# Altium PCB RailGun and Grabber PCB.PcbDoc (part 1 of 2)
Units mm, origin at the board's own origin, x right, y up, seen from the top; angles counter-clockwise.
Board outline 60 x 60 mm, 2 copper layers (Top Layer, Bottom Layer); 106 components, 58 nets, 345 pads, 4 vias.
Unrouted connection lines stored in the file: 213.
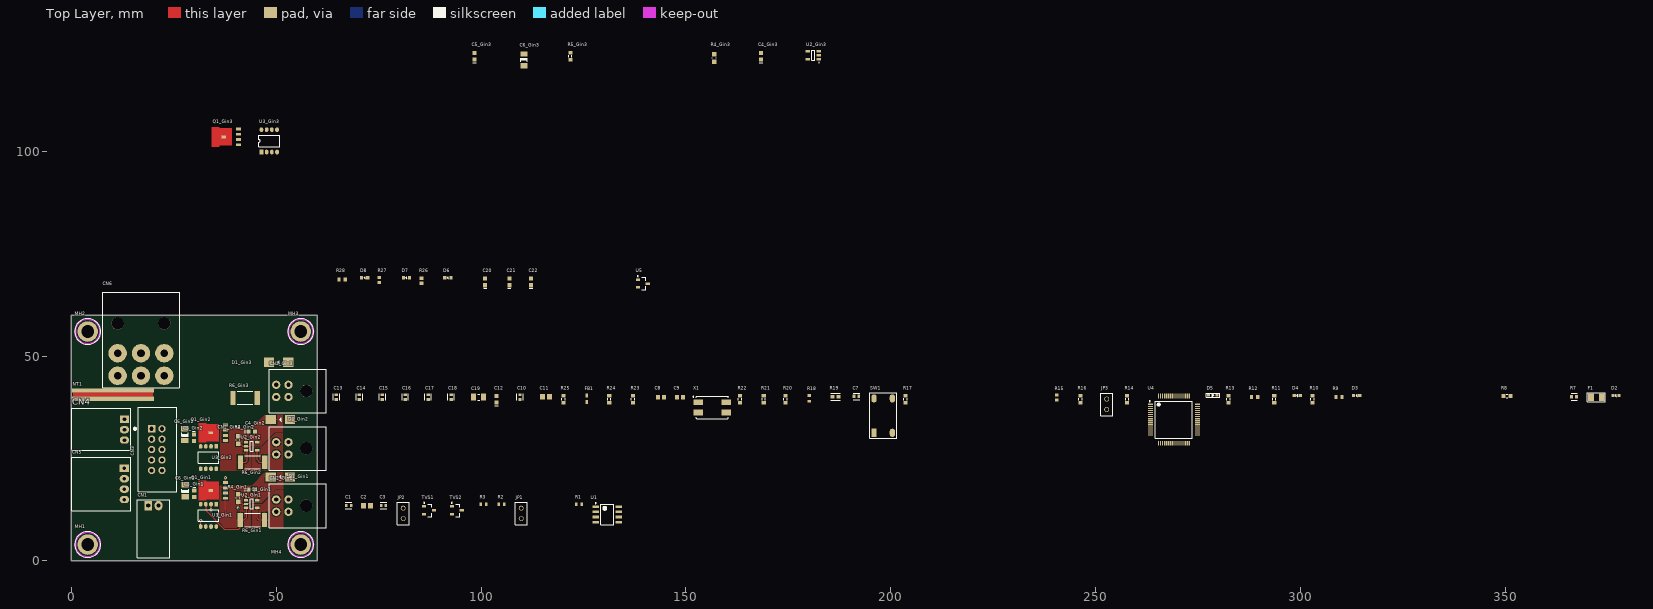
[diagram p0: Top Layer view]
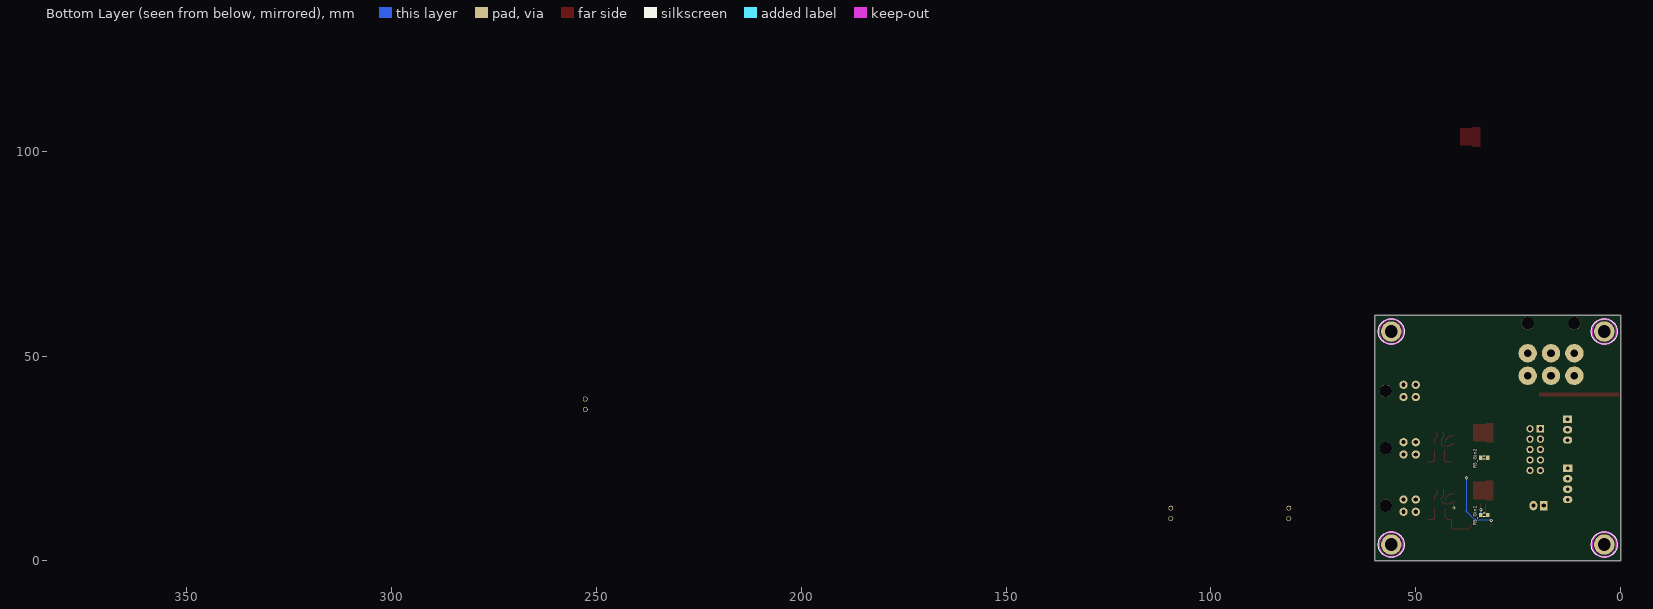
[diagram p1: Bottom Layer view, seen from below]

## Layer stack, top to bottom
Top Solder: solder mask 0.0102, Solder Resist, Dk 3.5
Top Layer: signal copper 0.0356
Dielectric 1: dielectric 0.32, FR-4, Dk 4.8
Bottom Layer: signal copper 0.0356
Bottom Solder: solder mask 0.0102, Solder Resist, Dk 3.5

## Board outline
0,0 0,60 60,60 60,0

## Design rules (kind name [scope] priority, off if disabled: settings)
Clearance [All] p1: gap=0.254 ignorepadtopadclearanceinfootprint=TRUE except(0: Arc-Hole Track-Hole SMDPad-Hole THPad-Hole Via-Hole Fill-Hole Poly-Hole Region-Hole Text-Hole; 0.203: Arc-Arc Arc-Track Arc-SMDPad Track-Track Track-SMDPad SMDPad-SMDPad)
DiffPairsRouting [All] p1: maxlimit=0.254 minlimit=0.254 mostfreqgap=0.254 toplayer_minwidth=0.152 toplayer_maxwidth=0.254 toplayer_prefwidth=0.203 bottomlayer_minwidth=0.152 bottomlayer_maxwidth=0.254 bottomlayer_prefwidth=0.203 maxuncoupledlength=12.7
PolygonConnect [All] p1: connectstyle=Relief reliefconductorwidth=0.254 reliefentries=4 polygonreliefangle="90 Angle" airgapwidth=0.254
RoutingVias [All] p1: holewidth=0.254 width=0.508 viastyle="Through Hole" minholewidth=0.127 minwidth=0.254 maxholewidth=0.381 maxwidth=0.762
SolderMaskExpansion [All] p1: expansion=0.102 istentingtop=FALSE
UnRoutedNet [All] p1: checkbadconnections=TRUE
Width [All] p1: maxlimit=1 minlimit=0.152 preferedwidth=0.203 minimp=50.000000 maximp=50.000000 favimp=50.000000
28 further rules are at their usual default settings.

## Classes and differential pairs
channel class "Control Gates": Gin1 Gin2 Gin3
net class Phase_Input[1..3]: Phase_Input1 Phase_Input2 Phase_Input3
net class Phase_Current[1..3]: Phase_Current1 Phase_Current2 Phase_Current3
component class Gin3: C4_Gin3 C5_Gin3 C6_Gin3 CN2_Gin3 D1_Gin3 Q1_Gin3 R4_Gin3 R5_Gin3 R6_Gin3 U2_Gin3 U3_Gin3
component class Gin2: C4_Gin2 C5_Gin2 C6_Gin2 CN2_Gin2 D1_Gin1 Q1_Gin2 R4_Gin1 R5_Gin2 R6_Gin2 U2_Gin2 U3_Gin2
component class Gin1: C4_Gin1 C5_Gin1 C6_Gin1 CN2_Gin1 D1_Gin1 Q1_Gin1 R4_Gin1 R5_Gin1 R6_Gin1 U2_Gin1 U3_Gin2
component class Power: C20 C21 C22 CN6 D6 D7 D8 NT1 R26 R27 R28 U5
component class Micro: C7 C8 C9 C10 C11 C12 C13 C14 C15 C16 C17 C18 C19 CN3 CN4 CN5 D2 D3 D4 D5 F1 FB1 JP3 MH1 MH2 MH3 MH4 R7 R8 R9 R10 R11 R12 R13 R14 R15 R16 R17 R18 R19 R20 R21 R22 R23 R24 R25 SW1 U4 X1
component class CAN: C1 C2 C3 CAN0 CN1 JP1 JP2 R1 R2 R3 TVS1 TVS2 U1
differential pair CAN: +CAN_P -CAN_N

## Components (designator, comment, footprint, x,y, rotation, side; value= is the part's Value field where it differs from the comment)
C1 "CL10B104JB8NNNC" FP-CL10-0_1-MFG 67.7,13.55 r0 top
C2 "CL21B105KBFNNNG" "0803 CAP" 72.2,13.45 r0 top
C3 "CL10B104JB8NNNC" FP-CL10-0_1-MFG 76.2,13.55 r0 top
C4_Gin1 "0.1uF" "CAPC1608N(0603\")" 44,17.4 r0 top (schematic designator C4)
C4_Gin2 "0.1uF" "CAPC1608N(0603\")" 44,31.6 r0 top (schematic designator C4)
C4_Gin3 "0.1uF" "CAPC1608N(0603\")" 168.3,123.2 r90 top (schematic designator C4)
C5_Gin1 "0.1uF" "CAPC1608N(0603\")" 30,16.4 r270 top (schematic designator C5)
C5_Gin2 "0.1uF" "CAPC1608N(0603\")" 29.9,30.1 r270 top (schematic designator C5)
C5_Gin3 "0.1uF" "CAPC1608N(0603\")" 98.4,123.2 r90 top (schematic designator C5)
C6_Gin1 "10uF 50V" "CAPC3216N(1206\")" 27.8,17.15 r270 top value=10µF (schematic designator C6)
C6_Gin2 "10uF 50V" "CAPC3216N(1206\")" 27.7,30.85 r270 top value=10µF (schematic designator C6)
C6_Gin3 "10uF 50V" "CAPC3216N(1206\")" 110.5,122.3 r90 top value=10µF (schematic designator C6)
C7 "CL10B104JB8NNNC" FP-CL10-0_1-MFG 191.6,40.175 r0 top
C8 "16pF Ceramic 50V 5% 0603" CAPC1608X90X35ML10T15 143.9,39.975 r0 top
C9 "16pF Ceramic 50V 5% 0603" CAPC1608X90X35ML10T15 148.6,39.975 r0 top
C10 "CL10B104JB8NNNC" FP-CL10-0_1-MFG 109.5,39.975 r90 top
C11 "CL21B105KBFNNNG" "0803 CAP" 115.9,40.075 r0 top
C12 "2.2uF, 50V" "CAPC1608N(0603\")" 103.8,39.475 r90 top value=2.2µF
C13 "CL10B104JB8NNNC" FP-CL10-0_1-MFG 64.7,39.975 r90 top
C14 "CL10B104JB8NNNC" FP-CL10-0_1-MFG 70.3,39.975 r90 top
C15 "CL10B104JB8NNNC" FP-CL10-0_1-MFG 75.9,39.975 r90 top
C16 "CL10B104JB8NNNC" FP-CL10-0_1-MFG 81.5,39.975 r90 top
C17 "CL10B104JB8NNNC" FP-CL10-0_1-MFG 87.1,39.975 r90 top
C18 "CL10B104JB8NNNC" FP-CL10-0_1-MFG 92.7,39.975 r90 top
C19 "50V 10uF" CAPC3216X180X50LL20T30 99.4,39.975 r0 top
C20 "0.1uF, 50V, 10%, X7R, 1608" "CAPC1608N(0603\")" 101,68.1 r90 top
C21 "1uF 50V 0603 SMD, Ceramic" "CAPC1608N(0603\")" 106.9,68.1 r90 top value=1µF
C22 "1uF 50V 0603 SMD, Ceramic" "CAPC1608N(0603\")" 112.2,68.1 r90 top value=1µF
CN1 "1x2 Shrouded Right Angle" "2X1 Female Header" 18.76,13.5 r90 top
CN2_Gin1 "Header, Female, 2x2, RIght Angle, Pitch: 0.118\"  (3.00mm), THT" "2x2 Pitch 118mil connector" 53,15 r270 top (schematic designator CN2)
CN2_Gin2 "Header, Female, 2x2, RIght Angle, Pitch: 0.118\"  (3.00mm), THT" "2x2 Pitch 118mil connector" 53,29 r270 top (schematic designator CN2)
CN2_Gin3 "Header, Female, 2x2, RIght Angle, Pitch: 0.118\"  (3.00mm), THT" "2x2 Pitch 118mil connector" 53,43 r270 top (schematic designator CN2)
CN3 "ST Debug Header 10-pin THT" "10-pin shrouded header THT" 19.6,32.26 r270 top
CN4 "Header, Male, 1x3, RA, Pitch (2.54mm) 0.1\"" 5-103635-2-Footprint-1 12.964,34.58 r0 top
CN5 "Header, Male, 1x4, RA, Pitch 0.1\" (2.54mm)" "HEADER, MALE, SHROUDED, 4x1, PITCH 0.1\" (2.54mm), RA" 12.954,22.6 r0 top
CN6 "76825-0006" 76825-0006-Footprint-1 11.3,50.7 r0 top
D1_Gin1 "TSSA5U50E3GCT-ND" DO-214AC 51.05,20.5 r180 top (schematic designator D1)
D1_Gin2 "TSSA5U50E3GCT-ND" DO-214AC 51.05,34.5 r180 top (schematic designator D1)
D1_Gin3 "TSSA5U50E3GCT-ND" DO-214AC 50.6,48.5 r180 top (schematic designator D1)
D2 "Red" FP-LB_Q39E-MFG 376.999,40.375 r0 top
D3 "Blue" FP-LB_Q39E-MFG 313.7,40.375 r0 top
D4 "Green" FP-LB_Q39E-MFG 299.2,40.375 r0 top
D5 "CUS08F30,H3F" SC-76 278.6,40.475 r0 top
D6 "Green" FP-LB_Q39E-MFG 91.9,69.1 r0 top
D7 "Green" FP-LB_Q39E-MFG 81.8,69.1 r0 top
D8 "Green" FP-LB_Q39E-MFG 71.6,69.1 r0 top
F1 "SMD Fuse, 2A, 63V," "1206 SMD" 372.199,39.975 r0 top
FB1 "BLM18AG601SN1D" MURA-BLM18-F-H1-CHIP-2_V 125.8,39.575 r90 top
JP1 "1x2 Male Header" "2X1 Males Header" 109.8,10.35 r90 top
JP2 "1x2 Male Header" "2X1 Males Header" 81,10.35 r90 top
JP3 "1x2 Male Header" "2X1 Males Header" 252.7,36.975 r90 top
MH1 "Mount_Hole_3mm" Mount-Hole_3mm 4,4 r0 top locked
MH2 "Mount_Hole_3mm" Mount-Hole_3mm 4,56 r0 top locked
MH3 "Mount_Hole_3mm" Mount-Hole_3mm 56,56 r0 top locked
MH4 "Mount_Hole_3mm" Mount-Hole_3mm 56,4 r0 top locked
NT1 "Net Tie, 20x3mm" NETTIE_20x3mm 10.2,40.6 r270 top net-tie
Q1_Gin1 "MOSFET N-Channel" LFPAK-PowerSO8 37.6,15.295 r90 top (schematic designator Q1)
Q1_Gin2 "MOSFET N-Channel" LFPAK-PowerSO8 37.6,29.395 r90 top (schematic designator Q1)
Q1_Gin3 "MOSFET N-Channel" LFPAK-PowerSO8 40.8,101.6 r90 top (schematic designator Q1)
R1 "33R" RESC1608X55X25LL10T15 123.9,13.85 r0 top
R2 "120R" RESC1608X55X25LL10T15 105,13.85 r0 top
R3 "33R" RESC1608X55X25LL10T15 100.6,13.85 r0 top
R4_Gin1 "80.6kR, 1%, 1/10W, 0603" RESC0603(1608)_M 40.7,15.4 r90 top (schematic designator R4)
R4_Gin2 "80.6kR, 1%, 1/10W, 0603" RESC0603(1608)_M 40.7,29.5 r90 top (schematic designator R4)
R4_Gin3 "80.6kR, 1%, 1/10W, 0603" RESC0603(1608)_M 156.9,122.8 r90 top (schematic designator R4)
R5_Gin1 "10kR" "RESC1608N(0603\")" 33.3,11.2 r180 bottom value=10k (schematic designator R5)
R5_Gin2 "10kR" "RESC1608N(0603\")" 33.3,25.2 r180 bottom value=10k (schematic designator R5)
R5_Gin3 "10kR" "RESC1608N(0603\")" 121.8,123.2 r90 top value=10k (schematic designator R5)
R6_Gin1 "0R02, 1%, 2W, 2512 SMD" "RESC6332N(2512\")" 44.2,10 r180 top value=0.02 (schematic designator R6)
R6_Gin2 "0R02, 1%, 2W, 2512 SMD" "RESC6332N(2512\")" 44.25,24.1 r180 top value=0.02 (schematic designator R6)
R6_Gin3 "0R02, 1%, 2W, 2512 SMD" "RESC6332N(2512\")" 42.4,39.8 r180 top value=0.02 (schematic designator R6)
R7 "CRCW0603330RFKEA" FP-CRCW0603-e3-IPC_C 366.799,40.075 r0 top
R8 "1kR" "RESC1608N(0603\")" 350.399,40.275 r0 top value=1k
R9 "RC0603FR-07110RL" RESC1608X55X25ML10T15 309.4,39.975 r0 top
R10 "10kR" "RESC1608N(0603\")" 302.9,39.475 r90 top value=10k
R11 "10kR" "RESC1608N(0603\")" 293.6,39.475 r90 top value=10k
R12 "RC0603FR-07110RL" RESC1608X55X25ML10T15 288.8,39.975 r0 top
R13 "10kR" "RESC1608N(0603\")" 282.4,39.475 r90 top value=10k
R14 "10kR" "RESC1608N(0603\")" 257.7,39.475 r90 top value=10k
R15 "ERJ-3EKF8252V" RESC1608X55X30LL15T15 240.5,39.875 r90 top
R16 "16kR, 1%, 1/10W, 0603 SMD" "RESC1608N(0603\")" 246.3,39.475 r90 top value=16k
R17 "10kR" "RESC1608N(0603\")" 203.6,39.475 r90 top value=10k
R18 "RC0603FR-0710KL" RESC1608X55X25NL10T15 180.1,39.675 r90 top
R19 "27kR" FP-CRGCQ0603-IPC_B 186.5,40.075 r0 top
R20 "10kR" "RESC1608N(0603\")" 174.3,39.475 r90 top value=10k
R21 "10kR" "RESC1608N(0603\")" 169,39.475 r90 top value=10k
R22 "10kR" "RESC1608N(0603\")" 163.2,39.475 r90 top value=10k
R23 "1kR" "RESC1608N(0603\")" 137.1,39.475 r90 top value=1k
R24 "1kR" "RESC1608N(0603\")" 131.3,39.475 r90 top value=1k
R25 "1kR" "RESC1608N(0603\")" 120.1,39.475 r90 top value=1k
R26 "6.34kR" RESC1609X50X30NL10T20 85.5,68.4 r90 top
R27 "536R" RESC1608X55X30LL15T15 75.2,68.6 r90 top
R28 "110R" RESC1608X55X25ML10T15 66.1,68.7 r0 top
SW1 "PTS645SL43SMTR92LFS" 4-SPST-NO 195.9,31.475 r90 top
TVS1 "PESD36VS2UT,215" SOT95P245X110-3N 87.3,12.35 r0 top
TVS2 "PESD36VS2UT,215" SOT95P245X110-3N 94.1,12.35 r0 top
U1 "CAN Transceiver" 8-SOIC 130.8,11.35 r0 top
U2_Gin1 "INA168, Current Sensor, High-Side, Analog" SOT23-5 44,13.9 r270 top (schematic designator U2)
U2_Gin2 "INA168, Current Sensor, High-Side, Analog" SOT23-5 44,28 r270 top (schematic designator U2)
U2_Gin3 "INA168, Current Sensor, High-Side, Analog" SOT23-5 181.1,123.4 r90 top (schematic designator U2)
U3_Gin1 "MIC5014YM-TR" "SOC 8" 35.37,13.86 r270 top (schematic designator U3)
U3_Gin2 "MIC5014YM-TR" "SOC 8" 35.37,27.96 r270 top (schematic designator U3)
U3_Gin3 "MIC5014YM-TR" "SOC 8" 46.4,99.8 r90 top (schematic designator U3)
U4 "STM32F413RGT6" FP-LQFP64-5W-MFG 269.1,34.475 r0 top
U5 "3.3V 250mA Linear Reg LDO" SOT95P245X110-3N 139.5,67.7 r0 top
X1 "CRYSTAL 8.0MHZ 16PF SMD" QFN250P750X520X140_HS-5M 156.4,37.475 r0 top

## Footprints (in the part's own frame and the unit in brackets; to place one, negate y for a bottom-side part, rotate by r counter-clockwise, add the part's x,y. Pads: shape width x height; smd on the part's side, far side on the other; paste and mask are expansions set on the pad)
"2X1 Female Header" [mil]
  rect 90x75 hole 40: 1(0,0)
  oval 90x75 hole 40: 2(0,-100)
  silkscreen extent -500,-205 55,105, body extent -495,-200 40,100, height 273
"2X1 Males Header" [mm]
  round 1.2 hole 0.9: 1(0,0) 2(2.54,0)
  silkscreen extent -1.5,-1.5 4,1.5, body extent -1.27,-1.24 3.81,1.25, height 8.54
"2x2 Pitch 118mil connector" [mil]
  round 80 hole 40: 1(0,0) 2(117.99,0) 3(0,-118) 4(118,-118)
  round 118.11 hole 118.11: None(59.06,170.08)
  silkscreen extent -150,-184 270,365, body extent -141,-129 259,353, height 348
4-SPST-NO [mm]
  rect 2x1.3 smd: 1(-0.2,0)
  oval 2x1.3 smd: 2(8.2,0) 3(-0.2,-4.5) 4(8.2,-4.5)
  silkscreen extent -1.52,-5.59 9.53,1.02, body extent -0.56,-5.29 8.44,0.71, height 5
5-103635-2-Footprint-1 [mil]
  rect 90x70 hole 35: 1(0,0)
  oval 90x70 hole 35: 2(0,-100) 3(0,-200)
  silkscreen extent -505,-300 60,105, body extent -495,-295 40,100, height 280
8-SOIC [mm] "SOIC, 8-Leads, Body 5x4mm, Pitch 1.27mm, IPC Low Density"
  rrect15% 1.65x0.65 smd: 1(-2.825,1.905) 2(-2.825,0.635) 3(-2.825,-0.635) 4(-2.825,-1.905) 5(2.825,-1.905) 6(2.825,-0.635) 7(2.825,0.635) 8(2.825,1.905)
  silkscreen extent -2.95,-2.5 1.6,2.9, body extent -3,-2.45 3,2.45, height 1.63
"10-pin shrouded header THT" [mil]
  rect 70x70 hole 40: 1(0,0)
  round 70 hole 40: 2(100,0) 3(200,0) 4(300,0) 5(400,0) 6(0,100) 7(100,100) 8(200,100) 9(300,100) 10(400,100)
  silkscreen extent -205,-170 605,240, body extent -198,-124 598,234, height 358
"0803 CAP" [mm] "Chip Capacitor, 2-Leads, Body 2.00x1.25mm, IPC Medium Density"
  rect 1.2x1.4 smd: 1(-0.85,0) 2(0.85,0)
  body extent -1.05,-0.67 1.05,0.67, height 1.25
"1206 SMD" [mm]
  rect 1.42x1.78 smd: 1(-1.33,0) 2(1.33,0)
  silkscreen extent -2.22,-1.07 2.21,1.07, body extent -1.6,-0.8 1.6,0.8, height 0.6
76825-0006-Footprint-1 [mm]
  round 4.5 hole 1.85: 1(0,0) 2(5.7,0) 3(11.4,0) 4(0,-5.5) 5(5.7,-5.5) 6(11.4,-5.5)
  round 3.05 hole 3.05: None1(0,7.3) None2(11.4,7.3)
  silkscreen extent -3.68,-8.38 15.11,14.86, body extent -3.16,-6.03 14.6,15.93, height 14.54
"CAPC1608N(0603\")" [mm] "Chip Capacitor, Body 1.6x0.8mm (0603\"), IPC Medium Density"
  rect 1x1 smd: 1(-0.8,0) 2(0.8,0)
  silkscreen extent -1.6,-0.4 -1.6,0.4, body extent -0.8,-0.4 0.8,0.4, height 0.9
CAPC1608X90X35ML10T15 [mm] "Chip Capacitor, 2-Leads, Body 1.60x0.80mm, IPC Low Density"
  rect 0.95x1.05 smd: 1(-0.725,0) 2(0.725,0)
  body extent -0.85,-0.45 0.85,0.45, height 0.9
"CAPC3216N(1206\")" [mm] "Chip Capacitor, Body 3.2x1.6mm (1206\"), IPC Medium Density"
  rect 1.3x1.8 smd: 1(-1.45,0) 2(1.45,0)
  silkscreen extent -0.4,-0.8 0.4,0.8, body extent -1.6,-0.8 1.6,0.8, height 1
CAPC3216X180X50LL20T30 [mm] "Chip Capacitor, 2-Leads, Body 3.4x1.8mm, IPC High Density"
  rect 1.2x1.7 smd: 1(-1.25,0) 2(1.25,0)
  silkscreen extent -0.25,-0.75 0.25,0.75, body extent -1.7,-0.9 1.7,0.9, height 1.8
DO-214AC [mm]
  rect 2.5x2.2 smd: 1(-2.35,0) 2(2.35,0)
  silkscreen extent -0.2,-0.43 0.23,0.43, body extent -2.74,-1.4 2.74,1.4, height 2.26
FP-CL10-0_1-MFG [mm]
  rect 0.625x0.825 smd paste+0 mask+0: 1(-0.575,0) 2(0.575,0)
  silkscreen extent -0.8,-0.79 0.8,0.79, body extent -0.99,-0.55 0.99,0.55, height 0.25
FP-CRCW0603-e3-IPC_C [mm]
  rect 0.735x0.862 smd paste+0 mask+0: 1(-0.615,0) 2(0.615,0)
  silkscreen extent -0.75,-0.85 0.75,0.85, body extent -1.08,-0.58 1.08,0.58, height 0.25
FP-CRGCQ0603-IPC_B [mm]
  rect 0.958x0.912 smd paste+0 mask+0: 1(-0.727,0) 2(0.727,0)
  silkscreen extent -1.21,-0.86 1.21,0.86, body extent -1.46,-0.71 1.46,0.71, height 0.25
FP-LB_Q39E-MFG [mm]
  rect 0.8x0.8 smd paste+0 mask+0: 1(-0.75,0) 2(0.75,0)
  silkscreen extent -0.13,-0.25 0.13,0.25, body extent -1.25,-0.55 1.25,0.55, height 0.25
FP-LQFP64-5W-MFG [mm]
  rect 1.2x0.3 smd paste+0 mask+0: 1(-5.75,3.75) 2(-5.75,3.25) 3(-5.75,2.75) 4(-5.75,2.25) 5(-5.75,1.75) 6(-5.75,1.25) 7(-5.75,0.75) 8(-5.75,0.25) 9(-5.75,-0.25) 10(-5.75,-0.75) 11(-5.75,-1.25) 12(-5.75,-1.75) 13(-5.75,-2.25) 14(-5.75,-2.75) 15(-5.75,-3.25) 16(-5.75,-3.75) 33(5.75,-3.75) 34(5.75,-3.25) 35(5.75,-2.75) 36(5.75,-2.25) 37(5.75,-1.75) 38(5.75,-1.25) 39(5.75,-0.75) 40(5.75,-0.25) 41(5.75,0.25) 42(5.75,0.75) 43(5.75,1.25) 44(5.75,1.75) 45(5.75,2.25) 46(5.75,2.75) 47(5.75,3.25) 48(5.75,3.75)
  rect 0.3x1.2 smd paste+0 mask+0: 17(-3.75,-5.75) 18(-3.25,-5.75) 19(-2.75,-5.75) 20(-2.25,-5.75) 21(-1.75,-5.75) 22(-1.25,-5.75) 23(-0.75,-5.75) 24(-0.25,-5.75) 25(0.25,-5.75) 26(0.75,-5.75) 27(1.25,-5.75) 28(1.75,-5.75) 29(2.25,-5.75) 30(2.75,-5.75) 31(3.25,-5.75) 32(3.75,-5.75) 49(3.75,5.75) 50(3.25,5.75) 51(2.75,5.75) 52(2.25,5.75) 53(1.75,5.75) 54(1.25,5.75) 55(0.75,5.75) 56(0.25,5.75) 57(-0.25,5.75) 58(-0.75,5.75) 59(-1.25,5.75) 60(-1.75,5.75) 61(-2.25,5.75) 62(-2.75,5.75) 63(-3.25,5.75) 64(-3.75,5.75)
  silkscreen extent -6.02,-4.5 4.5,4.65, body extent -6.45,-6.45 6.45,6.45, height 0.25
"HEADER, MALE, SHROUDED, 4x1, PITCH 0.1\" (2.54mm), RA" [mil]
  rect 90x70 hole 35: 1(0,0)
  oval 90x70 hole 35: 2(0,-100) 3(0,-200) 4(0,-300)
  silkscreen extent -505,-405 60,105, body extent -495,-397 40,97, height 270
LFPAK-PowerSO8 [mm] "LFPAK-PowerSO8"
  rect 0.7x1.25 smd: 1(0,0) 2(1.27,0) 3(2.54,0) 4(3.81,0)
  rect 0.7x1.15 smd: 5(1.905,3.6)
  Top Layer region: -0.195,1.625 4.005,1.625 4.005,4.725 4.255,4.725 4.255,6.5 3.74,6.5 3.1,6.5 1.9,6.5 -0.445,6.5 -0.445,4.725 -0.195,4.725
  body extent -0.59,-0.4 4.41,6.2, height 1.09
Mount-Hole_3mm [mm]
  round 5 hole 3.1: 1(0,0)
  Keep-Out Layer circle w0.508: c0,0 r3.048
  silkscreen extent -3.15,-3.15 3.15,3.15, body extent -2.25,-2.6 2.25,2.6, height 4.19
MURA-BLM18-F-H1-CHIP-2_V [mm] "Chip Ferrite Bead, 2-Leads, Body 1.6x0.8mm, Height 0.95mm, Flow"
  rect 0.95x0.7 smd: 1(-0.825,0) 2(0.825,0)
  body extent -0.8,-0.4 0.8,0.4, height 0.95
NETTIE_20x3mm [mm]
  rect 1x20 smd mask+0.102: 1(-1,0) 2(1,0)
  Top Layer region: -0.5,-9.75 0.5,-9.75 0.5,9.75 -0.5,9.75
QFN250P750X520X140_HS-5M [mm] "QFN, 4-Leads, Body 7.50x5.20mm, Pitch 2.50mm, Thermal Pad 4.10x1.10mm, IPC Low Density"
  rect 2.3x1.4 smd: 1(-3.4,1.25) 2(-3.4,-1.25) 3(3.4,-1.25) 4(3.4,1.25)
  silkscreen extent -4.67,-2.75 3.9,2.75, body extent -3.75,-2.6 3.75,2.6, height 1.4
RESC0603(1608)_M [mm] "Chip Resistor, Body 1.6x0.8mm, IPC Low Density"
  rect 1.1x1.1 smd: 1(-0.9,0) 2(0.9,0)
  silkscreen extent -0.05,-0.45 0.05,0.45, body extent -0.85,-0.47 0.85,0.47, height 0.6
"RESC1608N(0603\")" [mm] "Chip Resistor, Body 1.6x0.8mm (0603\"), IPC Medium Density"
  rect 0.9x1 smd: 1(-0.85,0) 2(0.85,0)
  silkscreen extent -0.2,-0.4 0.2,0.4, body extent -0.77,-0.42 0.78,0.43, height 0.44
RESC1608X55X25LL10T15 [mm] "Chip Resistor, 2-Leads, Body 1.60x0.80mm, IPC High Density"
  rect 0.6x0.8 smd: 1(-0.65,0) 2(0.65,0)
  body extent -0.85,-0.45 0.85,0.45, height 0.55
RESC1608X55X25ML10T15 [mm] "Chip Resistor, 2-Leads, Body 1.60x0.80mm, IPC Low Density"
  rect 0.8x1 smd: 1(-0.75,0) 2(0.75,0)
  body extent -0.85,-0.45 0.85,0.45, height 0.55
RESC1608X55X25NL10T15 [mm] "Chip Resistor, 2-Leads, Body 1.70x0.90mm, IPC Medium Density"
  rect 0.7x0.9 smd: 1(-0.7,0) 2(0.7,0)
  body extent -0.85,-0.45 0.85,0.45, height 0.55
RESC1608X55X30LL15T15 [mm] "Chip Resistor, 2-Leads, Body 1.60x0.80mm, IPC High Density"
  rect 0.7x0.85 smd: 1(-0.625,0) 2(0.625,0)
  body extent -0.87,-0.48 0.87,0.48, height 0.55
RESC1609X50X30NL10T20 [mm] "Chip Resistor, 2-Leads, Body 1.55x0.85mm, IPC Medium Density"
  rect 0.8x0.95 smd: 1(-0.625,0) 2(0.625,0)
  body extent -0.82,-0.48 0.82,0.48, height 0.5
"RESC6332N(2512\")" [mm] "Chip Resistor, Body 6.3x3.2mm (2512\"), IPC Medium Density"
  rect 1.3x3.4 smd: 1(-2.95,0) 2(2.95,0)
  silkscreen extent -1.9,-1.6 1.9,1.6, body extent -3.2,-1.6 3.2,1.6, height 0.6
SC-76 [mm]
  rect 0.8x0.6 smd: A(-1.05,0) K(1.05,0)
  silkscreen extent -1.65,-0.5 1.65,0.5, body extent -1.25,-0.65 1.25,0.6, height 0.9
"SOC 8" [mm]
  rect 1.14x0.91 smd: 1(0,0)
  oval 1.14x0.91 smd: 2(0,-1.27) 3(0,-2.54) 4(0,-3.81) 5(5.46,-3.81) 6(5.46,-2.54) 7(5.46,-1.27) 8(5.46,0)
  silkscreen extent 1.3,-4.44 4.16,0.64, body extent -0.33,-4.32 5.67,0.58, height 1.75
SOT23-5 [mm] "SOT23-5 SMT"
  rect 0.6x1.05 smd: 1(-0.95,-1.35) 2(0,-1.35) 3(0.95,-1.35) 4(0.95,1.35) 5(-0.95,1.35)
  silkscreen extent -1.8,-1.4 1.2,0.35, body extent -1.5,-1.25 1.5,1.25, height 1.1
SOT95P245X110-3N [mm] "SOT23, 3-Leads, Body 2.90x2.45mm, Pitch 0.95mm, IPC Medium Density"
  rect 1x0.6 smd: 1(-1.2,0.95) 2(-1.2,-0.95) 3(1.2,0)
  silkscreen extent -1.32,-1.5 0.7,1.92, body extent -1.3,-1.5 1.3,1.5, height 1.1

## Part data
C1 C3 C7 C10 C13 C14 C15 C16 C17 C18: library part CMP-00000-3, "CAP CER 0.1UF 50V X7R 0603", Capacitance=0.1uF, Case Code (Imperial)=0603, Case Code (Metric)=1608, Dielectric=X7R, Max Operating Temperature=125°C, Min Operating Temperature=-55°C, Package Quantity=1, Tolerance=5%, Voltage=50V, Case/Package=0603, Contact Plating=Tin, Depth=0.8mm, Height=0.8mm, Length=1.6mm, Material=Ceramic, Mount="Surface Mount", Packaging="Tape and Reel", Radiation Hardening=No, Thickness=0.035inch, Voltage Rating=50V, Width=0.031inch
C2 C11: library part CMP-00005-1, "SAMSUNG ELECTRO-MECHANICS - CL21B105KBFNNNG - MLCC CAPACITORS", Capacitance=1uF, Case Code (Imperial)=0805, Case Code (Metric)=2012, Dielectric=X7R, Max Operating Temperature=125°C, Min Operating Temperature=-55°C, Package Quantity=3000, Tolerance=10%, Voltage=50V, Case/Package=0805, Contact Plating=Tin, Depth=1.25mm, Length=2mm, Material=Ceramic, Mount="Surface Mount", Packaging="Tape and Reel", Termination=Wraparound, Thickness=0.053inch, Voltage Rating=50V, Width=0.049inch
C4_Gin1 C4_Gin2 C4_Gin3 C5_Gin1 C5_Gin2 C5_Gin3 C20: library part CMP-006-0008-1, "CAP CER 0.1UF 50V 10% X7R 1608 (0603)", Capacitance=0.1µF, Manufacturer="Samsung Electro-Mechanics America, Inc", Manufacturer Part Number=CL10B104KB8SFNC, Operating Temperature="-55°C ~ 125°C", Package / Case="0603 (1608 Metric)", Ratings=-, Temperature Coefficient=X7R, Tolerance=±10%, Voltage - Rated=50V, Applications="Boardflex Sensitive", Category=Capacitors, Component Type=Standard, ComponentLink1Description=http://www.samsungsem.com/servlet/FileDownload?type=spec&file=CL10B104KB8SFNC.pdf, ComponentLink1URL=http://www.samsungsem.com/servlet/FileDownload?type=spec&file=CL10B104KB8SFNC.pdf, Design Item ID="0.1uF, 50V, 10%, X7R, 1608", Features="Soft Termination", Height - Seated (Max)=-, Lead Spacing=-, Lead Style=-, Mounting Type="Surface Mount, MLCC", Packaging="Cut Tape (CT)", Pin Count=2, Pricing 1="1=0.12, 10=0.033, 25=0.0232, 100=0.0152, 500=0.01064, 1000=0.00829 (CAD)", RoHS="RoHS Compliant", Size / Dimension="0.063\" L x 0.031\" W (1.60mm x 0.80mm)", Source=AUVic_Schematic_Library_Capacitors.SchLib, Stock 1=743572, Thickness (Max)="0.035\" (0.90mm)"
C6_Gin1 C6_Gin2 C6_Gin3: library part CMP-006-0018-1, "Capacitor, Ceramic, 50V, +/- 10%, 1206 SMD, X5R", Component Type=Standard, Design Item ID="10uF 50V 1206 SMD, Ceramic", PackageDescription="Chip Capacitor", Pin Count=2, Published=14-06-01, Publisher=AUVic, Source=AUVic_Schematic_Library_Capacitors.SchLib
C8 C9: library part CMP-00087-2, "Cap Ceramic 16pF 50V C0G 5% SMD 0603 125C Paper T/R", Capacitance=16pF, Case Code (Imperial)=0603, Case Code (Metric)=1608, Dielectric=C0G, Max Operating Temperature=125°C, Min Operating Temperature=-55°C, Package Quantity=1, Temperature Coefficient=30ppm/°C, Tolerance=5%, Voltage="16pF 50V", Voltage Rating=50V, Case/Package=0603, Depth=0.8mm, Height=0.8mm, Lead Free="Lead Free", Length=1.6mm, Mount="Surface Mount", Packaging="Tape and Reel", Radiation Hardening=No, Termination=SMD/SMT, Thickness=0.035inch, Voltage Rating (DC)=50V, Width=0.8mm
C12: library part CMP-006-0030-1, "Capacitor, Ceramic, 50V, 10%, 0603 SMD, X5R", Component Type=Standard, Design Item ID="2.2uF, 50V, 0603 SMD, X5R, Ceramic", PackageDescription="Chip Capacitor", Pin Count=2, Publisher=AUVic, Source=AUVic_Schematic_Library_Capacitors.SchLib
C19: library part CMP-00004-1, "Cap Ceramic 10uF 50V X7R 10% Pad SMD 1206 125°C T/R", Capacitance=10uF, Case Code (Imperial)=1206, Case Code (Metric)=3216, Dielectric=X7R, Max Operating Temperature=125°C, Min Operating Temperature=-55°C, Tolerance=10%, Voltage Rating=50V, Case/Package=1206, Lead Free="Lead Free", Length=0.126inch, Mount="Surface Mount", Packaging="Tape and Reel", Thickness=0.071inch, Voltage Rating (DC)=50V, Width=0.063inch
C21 C22: library part CMP-006-0028-1, "Capacitor, Ceramic, 50V, +/- 10%, 0603 SMD, X5R", Component Type=Standard, Created By="Lyden Smith", Date Created=2017-10-26, Design Item ID="1uF 50V 0603 SMD, Ceramic", PackageDescription="Chip Capacitor", Pin Count=2, Source=AUVic_Schematic_Library_Capacitors.SchLib
CN1: library part CMP-00010-3, "02 MTE HDR SRRA LATCH", Color=Black, Contact Current Rating=3A, Contact Resistance=15mR, Flammability Rating="UL94 V-0", Insulation Resistance=5GR, Max Operating Temperature=105°C, Min Operating Temperature=-65°C, Package Quantity=68, Approvals=CSA, Backwall/Post Interruptions="No (Without)", Connector Type=Plug,Header,Pin, Contact Gender=Male, Contact Material=Brass, Contact Mating Length=0.23inch, Contact Plating=Gold,Tin,Matte, Contact Retention="Yes (With)", Contact Shape=Square, Current Rating=3A, Depth=13.59mm, ELV=Compliant, Gender=Male, Height=13.59mm, Housing Color=Black, Housing Material=Thermoplastic, Lead Free="Lead Free", Length=7.62mm, Mating Alignment="Yes (With)", Mating Retention="Yes (With)", Mount="Through Hole", Number of Contacts=2, Number of Positions=2, Number of Rows=1, Orientation="Right Angle", Packaging=Rail/Tube, PCB Mount Alignment="No (Without)", PCB Mount Retention=Without, PCB Mounting Orientation="Right Angle", PCB Thickness=0.062inch, Pitch=2.54mm, REACH SVHC=Unknown, Row Spacing=0.1inch, Strain Relief="No (Without)", Tail Length=3.3mm, Termination=Crimp
CN2_Gin1 CN2_Gin2 CN2_Gin3: library part CMP-005-0021-4, "Connector Header Through Hole, Right Angle 4 position 0.118\" (3.00mm)", Component Type=Standard, Created By="Poorna Chander Kalidas", Date Published=2020-05-16, Design Item ID="Header, Female, 2x2, RIght Angle, Pitch: 0.118\"  (3.00mm), THT", Pin Count=4, Publisher=AUVic, Source=AUVic_Schematic_Library_Connectors.SchLib
CN3: library part CMP-00011-6, "CONN HEADER VERT 10POS 2.54MM", Color=Black, Package Quantity=1, Connector Type="Male Pin", Contact Plating=Gold, Lead Free="Lead Free", Mount="Through Hole", Number of Positions=10, Number of Rows=2, Packaging=Tray, Pitch=0.1inch, Row Spacing=0.1inch, Termination=Solder
CN4: library part CMP-00099-4, "CONN HEADER RT/A .100 3POS 15AU", Color=Black, Contact Current Rating=3A, Contact Resistance=15mR, Flammability Rating="UL94 V-0", Insulation Resistance=5GR, Max Operating Temperature=105°C, Min Operating Temperature=-65°C, Package Quantity=52, Approvals=CSA, Backwall/Post Interruptions="No (Without)", Connector Type=Plug,Header,Pin, Contact Gender=Male, Contact Material=Brass, Contact Mating Length=0.23inch, Contact Plating=Gold,Tin,Matte, Contact Retention="Yes (With)", Contact Shape=Square, Current Rating=3A, Depth=13.59mm, Height=13.59mm, Housing Color=Black, Housing Material=Thermoplastic, Lead Pitch=2.54mm, Length=0.4inch, Mating Alignment="Yes (With)", Mating Retention="Yes (With)", Mount="Through Hole", Number of Contacts=3, Number of Positions=3, Number of Rows=1, Orientation="Right Angle", Packaging=Rail/Tube, PCB Mount Alignment="No (Without)", PCB Mount Retention=Without, PCB Mounting Orientation="Right Angle", Pitch=2.54mm, Plating Thickness=2.54um, REACH SVHC="No SVHC", Row Spacing=0.1inch, Strain Relief="No (Without)", Tail Length=3.3mm, Termination=Crimp, Width=0.4inch
CN5: library part CMP-005-0029-3, "Connector Header Through Hole, Right Angle 4 position 0.100\" (2.54mm)", Component Type=Standard, Created By="Miguel Manguerra", Created On=2020-05-20, Design Item ID="Header, Male, 1x4, RA, Pitch 0.1\" (2.54mm)", Pin Count=4, Source=AUVic_Schematic_Library_Connectors.SchLib
CN6: library part CMP-00049-2, "CONNECTOR, HEADER, 6POS, 2ROW, 5.7MM; Product Range:Mega-Fit 76825 Series; Contact Termination Type:Through Hole; Gender:Header; No. of Contacts:6; Pitch Spacing:5.7mm; Contact Plating:Tin Plated Contacts; Contact Material:Copper", Color=Black, Contact Material=Copper, Contact Plating=Tin, Gender=Male, Mount="Through Hole", Number of Circuits=6, Number of Contacts=6, Number of Pins=6, Number of Rows=2, Orientation="Right Angle", Pitch=5.7mm, REACH SVHC=Unknown, Termination="Through Hole"
D1_Gin1 D1_Gin2 D1_Gin3: library part CMP-057-0021-1, "Diode Schottky 50V 5A Surface Mount DO-214AC (SMA)", Component Type=Standard, Created By="Poorna Chander Kalidas", Date Created=2018-06-01, Design Item ID=TSSA5U50E3GCT-ND, Pin Count=2, Source=AUVic_Schematic_Library_Diodes.SchLib
D2: library part CMP-00066-2, "LED Red 645nm 2-Pin Chip 0603(1608Metric) T/R", Case Code (Imperial)=0603, Case Code (Metric)=1608, Forward Current=25mA, Forward Voltage=2.5V, Lens Color=White, Max Operating Temperature=85°C, Min Operating Temperature=-30°C, Package Quantity=1, Power Dissipation=65mW, Reverse Voltage=12V, Test Current=20mA, Case/Package=0603, Color=Red, Depth=0.9mm, Dominant Wavelength=633nm, Height=0.8mm, Illumination Color=Red, Length=1.7mm, Lens Size=0.8mm, Lens Style=Diffused,Flat,Colorless,Rectangular, Lens Transparency=Diffused, Luminous Flux=0.33lm, Luminous Intensity=180mcd, Mount="Surface Mount", Number of Elements=1, Number of LEDs=1, Number of Pins=2, Packaging="Tape and Reel", Radiation Hardening=No, Viewing Angle=160°, Width=0.8mm
D3: library part CMP-00063-3, "LED BLUE DIFFUSED 0603 SMD", Case Code (Imperial)=0603, Case Code (Metric)=1608, Forward Voltage=2.85V, Lens Color=White, Test Current=5mA, Case/Package=0603, Color=Blue, Dominant Wavelength=470nm, Height=0.4mm, Length=1.6mm, Lens Size=0.8mm, Lens Style=Flat,Diffused,Colorless,Rectangular, Lens Transparency=Diffused, Luminous Flux=0.13lm, Luminous Intensity=42mcd, Mount="Surface Mount", Number of LEDs=1, Number of Pins=2, Packaging="Tape and Reel", Radiation Hardening=No, Viewing Angle=130°, Width=0.8mm
D4 D6 D7 D8: library part CMP-00064-3, "LED GREEN DIFFUSED 0603 SMD", Case/Package=SMD/SMT, Forward Current=15mA, Forward Voltage=2.85V, Max Operating Temperature=85°C, Min Operating Temperature=-40°C, Reverse Voltage=5V, Test Current=5mA, Color=Green, Depth=0.9mm, Dominant Wavelength=530nm, Length=1.7mm, Lens Style=Diffused,Colorless,Rectangular, Luminous Flux=0.55lm, Luminous Intensity=280mcd, Mount="Surface Mount", Number of Elements=1, Number of LEDs=1, Number of Pins=2, Packaging="Tape and Reel", Radiation Hardening=No
D5: library part CMP-057-0000-2, "Diode Schottky 30V 800mA Surface Mount USC", Average Rectified Current=800mA, Case/Package=SOD, Max Operating Temperature=125°C, Max Repetitive Reverse Voltage (Vrrm)=30V, Min Operating Temperature=-55°C, Peak Non-Repetitive Surge Current=5A, Peak Reverse Current=50uA, Contact Plating=Tin,Silver, Element Configuration=Single, Max Reverse Voltage (DC)=30V, Mount="Surface Mount", Number of Pins=2, Packaging="Tape and Reel"
F1: library part CMP-027-0004-1, "SMD Fuse, 2A, 63VAC", Current=2A, Component Type=Standard, ComponentLink1Description=Digi-Key, ComponentLink1URL=https://www.digikey.ca/product-detail/en/bel-fuse-inc/C1F-2/507-1881-1-ND/4968159, Created By="Poorna Chander Kalidas", Date Created=2018-06-07, Design Item ID="SMD Fuse, 2A, 63V,", Pin Count=2, Source=AUVic_Integrated_Library_Fuses.SchLib, Type=SMD
FB1: library part CMP-00016-1, "MURATA - BLM18AG601SN1D - Feritový Korálek, 0603 / 1608, 600 ohm, 500 mA, Série BLM18A, 0.38 ohm, ± 25%", Case Code (Imperial)=0603, Case Code (Metric)=1608, Current Rating=500mA, DC Resistance (DCR)=380mR, Frequency=100MHz, Max Operating Temperature=125°C, Min Operating Temperature=-55°C, Package Quantity=1, Tolerance=25%, Case/Package=0603, Core Material=Ferrite, DC Current=500mA, Depth=0.8mm, Height=0.8mm, Impedance=600R, Lead Free="Lead Free", Length=1.6mm, Material=Steel,Ferrite, Max Current Rating=500mA, Max DC Current=500mA, Military Standard=Not, Number of Circuits=1, Number of Lines=1, Number of Pins=2, Packaging="Tape and Reel", Radiation Hardening=No, REACH SVHC="No SVHC", Shielding=Unshielded, Termination=SMD/SMT, Test Frequency=100MHz, Weight=7.1E-05oz, Width=0.8mm
JP1 JP2 JP3: library part CMP-004-0001-1, Component Type=Standard, Design Item ID="1x2 Male Header", Made By="Andy Bates", Pin Count=2, Source=AUVic_Schematic_Library_Connectors.SchLib
MH1 MH2 MH3 MH4: library part CMP-004-0010-4, "Mounting hold for M3 hex standoff", Component Type=Standard, Design Item ID=Mount_Hole_3mm, Pin Count=1, Source=AUVic_Schematic_Library_Connectors.SchLib
NT1: library part CMP-053-0007-2, Component Type="Net Tie", Created By="Ashwin Sira", Date Created=2016-06-17, Design Item ID="Net Tie, 20x3mm", Pin Count=2, Publisher=AUVic, Size=20mmx3mm, Source=AUVic_Integrated_Library_Virtual_Components.SchLib
Q1_Gin1 Q1_Gin2 Q1_Gin3: library part CMP-052-0019-1, "MOSFET N-Channel, 40V, 100A, 272W, Enh-Mode", Component Type=Standard, Created By="Ashwin Sira", Design Item ID="MOSFET N-Channel, 40V, 100A, 272W", Latest_Revision_By="Ashwin Sira", Latest_Revision_Date=2016_04_26, Latest_Revision_Note="Attached footprint", MFG="NXP Semiconductors", MFG#=PSMN1R8-40YLC,115, Pin Count=5, Publisher=AUVic, Reviewed_By="Ashwin Sira", Reviewed_Date=2016_04_26, Source=AUVic_Schematic_Library_Transistors.SchLib
R1 R3: library part CMP-00060-1, "Res Thick Film 0603 33 Ohm 1% 1/10W +/-100ppm/ßC Molded SMD Paper T/R", Case Code (Imperial)=0603, Case Code (Metric)=1608, Max Operating Temperature=155°C, Max Power Dissipation=100mW, Min Operating Temperature=-55°C, Package Quantity=1, Temperature Coefficient=100ppm/°C, Tolerance=1%, Voltage Rating=75V, Voltage Rating (DC)=50V, Case/Package=0603, Composition="Thick Film", Depth=0.8mm, Features="Moisture Resistant", Height=0.45mm, Lead Free="Lead Free", Lead Pitch=0.3mm, Length=1.6mm, Military Standard=Not, Number of Pins=2, Number of Terminations=2, Packaging="Tape and Reel", Power Rating=100mW, REACH SVHC="No SVHC", Resistance=33R, Termination=SMD/SMT, Weight=7.1E-05oz, Width=0.8mm
R2: library part CMP-00061-1, "Res Thick Film 0603 120 Ohm 1% 0.1W(1/10W) ±100ppm/C Epoxy SMD T/R", Case Code (Imperial)=0603, Case Code (Metric)=1608, Max Operating Temperature=155°C, Max Power Dissipation=100mW, Min Operating Temperature=-55°C, Package Quantity=1, Temperature Coefficient=100ppm/°C, Tolerance=1%, Voltage Rating=50V, Case/Package=0603, Composition="Thick Film", Depth=0.8mm, Features="Moisture Resistant", Height=0.022inch, Lead Free="Lead Free", Length=1.6mm, Military Standard=Not, Number of Pins=2, Number of Terminations=2, Packaging="Tape and Reel", Power Rating=100mW, REACH SVHC="No SVHC", Resistance=120R, Termination=SMD/SMT, Voltage Rating (DC)=50V, Width=0.031inch
R4_Gin1 R4_Gin2 R4_Gin3: library part CMP-00098-1, "Res Thick Film 0603 80.6K Ohm 1% 0.1W(1/10W) ±100ppm/C Molded SMD Automotive Paper T/R", Case Code (Imperial)=0603, Case Code (Metric)=1608, Max Operating Temperature=155°C, Max Power Dissipation=100mW, Min Operating Temperature=-55°C, Package Quantity=10, Resistance=80.6kR, Resistor Type="Thick Film", Temperature Coefficient=100ppm/°C, Tolerance=1%, Voltage Rating=75V, Case/Package=0603, Contact Plating=Tin, Depth=0.85mm, Features="Automotive AEC-Q200", Height=0.45mm, Lead Free="Lead Free", Length=1.55mm, Military Standard=Not, Number of Terminations=2, Packaging="Tape and Reel", Power Rating=100mW, Radiation Hardening=No, REACH SVHC=Unknown, Termination=SMD/SMT, Voltage Rating (DC)=75V, Weight=7.1E-05oz, Width=0.033inch, Working Voltage=75V
R5_Gin1 R5_Gin2 R5_Gin3 R10 R11 R13 R14 R17 R20 R21 R22: library part CMP-047-0013-1, "10kR, 1%, 1/10W, 0603 SMD", Component Type=Standard, Created On=14-05-31, Last Edited=14-05-31, Made By="Ashwin Sira", Owned By=AUVic, Pin Count=2, Source=AUVic_Schematic_Library_Resistors.SchLib
  R5_Gin1 R5_Gin2 R5_Gin3: Design Item ID="10kR, 1%, 1/10W, 0603 SMD"
  R10 R11 R13 R14 R17 R20 R21 R22: Design Item ID=10kR
R6_Gin1 R6_Gin2 R6_Gin3: library part CMP-047-0006-1, Component Type=Standard, ComponentLink1Description=Digikey, ComponentLink1URL=https://www.digikey.ca/product-detail/en/te-connectivity-passive-product/RLP73V3AR020FTDF/A109677CT-ND/4032443, Created By="Robert Keen", Created On=2018-08-16, Design Item ID="0R02, 1%, 2W, 2512 SMD", Pin Count=2, Source=AUVic_Schematic_Library_Resistors.SchLib
R7: library part CMP-00067-2, "Res Thick Film 0603 330 Ohm 1% 0.1W(1/10W) +/-100ppm/ßC Pad SMD Automotive T/R", Case Code (Imperial)=0603, Case Code (Metric)=1608, Max Operating Temperature=155°C, Max Power Dissipation=100mW, Min Operating Temperature=-55°C, Package Quantity=10, Resistance=330R, Temperature Coefficient=100ppm/°C, Tolerance=1%, Voltage Rating=75V, Case/Package=0603, Composition="Thick Film", Contact Plating=Tin, Depth=0.85mm, Features="Automotive AEC-Q200", Height=0.45mm, Lead Free="Lead Free", Length=1.55mm, Military Standard=Not, Mount="Surface Mount", Number of Terminations=2, Packaging="Tape and Reel", Power Rating=100mW, Radiation Hardening=No, REACH SVHC=Unknown, Termination=SMD/SMT, Voltage Rating (DC)=75V, Weight=7.1E-05oz, Width=0.033inch
R8 R23 R24 R25: library part CMP-047-0024-1, "1kR, 1%, 1/10W , 0603, SMD", Component Type=Standard, Created By="Andy Bates", Date Created=2017-05-10, Design Item ID=1kR, Pin Count=2, Publisher=AUVic, Source=AUVic_Schematic_Library_Resistors.SchLib
R9 R12: library part CMP-00069-1, "RES SMD 110 OHM 1% 1/10W 0603", Case Code (Imperial)=0603, Case Code (Metric)=1608, Max Operating Temperature=155°C, Max Power Dissipation=100mW, Min Operating Temperature=-55°C, Package Quantity=1, Resistance=110R, Temperature Coefficient=100ppm/°C, Tolerance=1%, Voltage Rating=50V, Working Voltage=75V, Case/Package=0603, Composition="Thick Film", Depth=0.8mm, Features="Moisture Resistant", Height=0.022inch, Lead Free="Lead Free", Length=1.6mm, Military Standard=Not, Number of Terminations=2, Packaging="Tape and Reel", Power Rating=100mW, Termination=SMD/SMT, Voltage Rating (DC)=50V, Width=0.031inch
R15: library part CMP-00085-1, "RES SMD 82.5K OHM 1% 1/10W 0603", Case Code (Imperial)=0603, Case Code (Metric)=1608, Max Operating Temperature=155°C, Max Power Dissipation=100mW, Min Operating Temperature=-55°C, Package Quantity=1, Resistance=82.5kR, Temperature Coefficient=100ppm/°C, Tolerance=1%, Voltage Rating=75V, Voltage Rating (DC)=50V, Case/Package=0603, Composition="Thick Film", Contact Plating=Tin, Depth=0.8mm, Features="Automotive AEC-Q200", Height=0.022inch, Lead Free="Lead Free", Length=1.6mm, Military Standard=Not, Mount="Surface Mount", Number of Terminations=2, Packaging="Tape and Reel", Power Rating=100mW, Radiation Hardening=No, REACH SVHC="No SVHC", Termination=SMD/SMT, Width=0.031inch
R16: library part CMP-047-0021-1, Component Type=Standard, Created On=14-05-31, Design Item ID="16kR, 1%, 1/10W, 0603 SMD", Last Edited=14-05-31, Made By="Ashwin Sira", Owned By=AUVic, Pin Count=2, Source=AUVic_Schematic_Library_Resistors.SchLib
R18: library part CMP-00037-1, "Res General Purpose Thick Film 0603 10K Ohm 1% 1/10W ±100ppm/°C Molded SMD Paper T/R", Case Code (Imperial)=0603, Case Code (Metric)=1608, Max Operating Temperature=155°C, Min Operating Temperature=-55°C, Power Rating=100mW, Resistance=10kR, Temperature Coefficient=100ppm/°C, Tolerance=1%, Voltage Rating=75V, Voltage Rating (DC)=50V, Case/Package=0603, Composition="Thick Film", Depth=0.8mm, Height=0.45mm, Lead Free="Lead Free", Lead Pitch=0.3mm, Length=1.6mm, Military Standard=Not, Number of Pins=2, Packaging="Tape and Reel", REACH SVHC="No SVHC", Termination=SMD/SMT, Weight=7.1E-05oz, Width=0.8mm
R19: library part CMP-00090-2, "Res Thick Film 0603 27K Ohm 1% 0.1W(1/10W) ±100ppm/C Pad SMD Automotive T/R"
R26: library part CMP-00072-1, "VISHAY         CRCW06036K34FKEA.             SMD Chip Resistor, Thick Film, 6.34 kohm, 75 V, 0603 [1608 Metric], 100 mW,  1%, CRCW Series", Case Code (Imperial)=0603, Case Code (Metric)=1608, Max Operating Temperature=155°C, Max Power Dissipation=100mW, Min Operating Temperature=-55°C, Package Quantity=10, Temperature Coefficient=100ppm/°C, Tolerance=1%, Voltage Rating=75V, Case/Package=0603, Composition="Thick Film", Contact Plating=Tin, Depth=0.85mm, Features="Automotive AEC-Q200", Height=0.45mm, Length=1.55mm, Military Standard=Not, Number of Pins=2, Number of Terminations=2, Packaging="Tape and Reel", Power Rating=100mW, Radiation Hardening=No, REACH SVHC=Unknown, Resistance=6.34kR, Termination=SMD/SMT, Weight=7.1E-05oz, Width=0.033inch
R27: library part CMP-00071-1, "SMD Chip Resistor, 0603 [1608 Metric], 536 ohm, ERJ3EK Series, 75 V, Thick Film, 100 mW", Case Code (Imperial)=0603, Case Code (Metric)=1608, Max Operating Temperature=155°C, Max Power Dissipation=100mW, Min Operating Temperature=-55°C, Package Quantity=1, Temperature Coefficient=100ppm/°C, Tolerance=1%, Voltage Rating=75V, Voltage Rating (DC)=50V, Case/Package=0603, Composition="Thick Film", Contact Plating=Tin, Depth=0.8mm, Features="Automotive AEC-Q200", Height=0.022inch, Lead Free="Lead Free", Length=1.6mm, Military Standard=Not, Mount="Surface Mount", Number of Terminations=2, Packaging="Tape and Reel", Power Rating=100mW, REACH SVHC="No SVHC", Resistance=536R, Termination=SMD/SMT, Width=0.8mm
R28: library part CMP-00069-1, "RES SMD 110 OHM 1% 1/10W 0603", Case Code (Imperial)=0603, Case Code (Metric)=1608, Max Operating Temperature=155°C, Max Power Dissipation=100mW, Min Operating Temperature=-55°C, Package Quantity=1, Temperature Coefficient=100ppm/°C, Tolerance=1%, Voltage Rating=50V, Working Voltage=75V, Case/Package=0603, Composition="Thick Film", Depth=0.8mm, Features="Moisture Resistant", Height=0.022inch, Lead Free="Lead Free", Length=1.6mm, Military Standard=Not, Number of Terminations=2, Packaging="Tape and Reel", Power Rating=100mW, Resistance=110R, Termination=SMD/SMT, Voltage Rating (DC)=50V, Width=0.031inch
SW1: library part CMP-00077-1, "Black Switch Tactile N.O. SPST Round Button Gull Wing 0.05A 12VDC 100000Cycles 1.27N SMD T/R", Button Colour=Black, Contact Resistance=100mR, Current Rating=50mA, Max Operating Temperature=60°C, Max Voltage Rating (DC)=12V, Min Operating Temperature=-20°C, Operating Force=1.27N, Package Quantity=1000, Actuator Length=0.85mm, Actuator Material=Nylon,Polyamide, Actuator Type=Standard, Color=Black, Contact Material=Bronze,Brass,Silver, Contact Plating=Silver, Depth=9mm, Illumination Type=Non-Illuminated, Lead Free="Lead Free", Length=6mm, Max Current Rating=50mA, Mechanical Life=100000Cycles, Mount="Surface Mount", Orientation=Straight, Packaging="Tape and Reel", Switch Function=Off-Mom, Termination="Gull Wing", Throw Configuration=SPST, Voltage Rating (DC)=12V
TVS1 TVS2: library part CMP-058-0000-2, "TVS DIODE 36V 60V SOT23", Component Type=Standard, Created By="Miguel Manguerra", Date Created=2020-05-18, Design Item ID=PESD36VS2UT,215, Pin Count=3, Source=AUVic_Schematic_Library_Diodes.SchLib
U1: library part CMP-032-0000-2, "1/1 Transceiver Half CANbus 8-SO", Case/Package=SO, Max Operating Temperature=150°C, Max Supply Current=70mA, Max Supply Voltage=5.5V, Min Operating Temperature=-40°C, Min Supply Voltage=4.5V, Package Quantity=2500, Contact Plating=Gold, Data Rate=1Mbps, Interface=CAN, Lead Free="Lead Free", Mount="Surface Mount", Nominal Supply Current=70mA, Number of Pins=8, Number of Transceivers=1, Packaging="Tape and Reel", Propagation Delay=250ns, Radiation Hardening=No, Turn-On Delay Time=250ns
U2_Gin1 U2_Gin2 U2_Gin3: library part CMP-048-0001-2, Component Type=Standard, Created By="Jacob Lower", Created On=2016-03-16, Design Item ID="INA168, Current Sensor, High-Side, Analog", Pin Count=5, Publisher=AUVic, Source=AUVic_Schematic_Library_Sensors.SchLib
U3_Gin1 U3_Gin2 U3_Gin3: library part CMP-028-0000-2, "High-Side or Low-Side Gate Driver IC Non-Inverting 8-SOIC", Case/Package=SOIC, Max Operating Temperature=85°C, Max Output Current=10mA, Max Supply Voltage=30V, Min Operating Temperature=-40°C, Min Supply Voltage=2.75V, Package Quantity=2500, Channel Type=Single, Height=1.48mm, Lead Free="Lead Free", Length=4.93mm, Mount="Surface Mount", Number of Drivers=1, Number of Outputs=1, Number of Pins=8, Packaging="Tape and Reel", Turn-Off Delay Time=30us, Turn-On Delay Time=8ms, Width=3.94mm
U4: library part CMP-00006-1, "STMICROELECTRONICS - STM32F413RGT6 - MCU, ARM CORTEX-M4, 100MHZ, LQFP-64", Case/Package=LQFP, Frequency=100MHz, Max Operating Temperature=85°C, Min Operating Temperature=-40°C, Core Architecture=ARM, Interface=I2C,SPI,USB,IrDA,MMC,SDIO,UART,USART, Memory Size=1MB, Memory Type=FLASH, Number of I/Os=50, Oscillator Type=Internal, Packaging=Tray, Peripherals="Brown-out Detect/Reset,POR,PWM,WDT,DMA,LCD"
U5: library part CMP-00003-1, "IC REG LINEAR 3.3V 250MA SOT23-3", Case/Package=SOT-23-3, Dropout Voltage=400mV, Max Input Voltage=6.6V, Max Operating Temperature=85°C, Max Output Current=250mA, Min Input Voltage=2.5V, Min Operating Temperature=-40°C, Output Voltage=3.3V, Package Quantity=3000, Quiescent Current=1uA, Supplier Part Number 1=AP2138N-3.3TRG1, Accuracy=2%, Created By="Poorna Chander Kalidas", Date Created="June 26, 2020", Height=1.3mm, Lead Free="Lead Free", Length=3.02mm, Mount="Surface Mount", Number of Outputs=1, Number of Pins=3, Number of Regulators=1, Output Current=250mA, Output Type=Fixed, Packaging="Tape and Reel", Polarity=Positive, Supplier 1=Digi-Key, Weight=0.000282oz, Width=1.7mm
X1: library part CMP-00079-2, "8MHz ±30ppm Crystal 16pF 80 Ohms 4-SMD, No Lead", Case/Package=CSMD, ESR (Equivalent Series Resistance)=80R, Frequency=8MHz, Frequency Stability=50ppm, Load Capacitance=16pF, Max Operating Temperature=70°C, Min Operating Temperature=-20°C, Depth=5.2mm, Length=7.5mm, Number of Pins=4, Packaging="Tape and Reel"

## Via types
v1: diameter 0.762, hole 0.381, Top Layer to Bottom Layer, tented both sides, 3 vias
v2: diameter 0.762, hole 0.381, Top Layer to Bottom Layer, 1 vias

## Nets (pads, with @x,y where several pads share a name; then routed paths per layer and width w, separated by ;. In a path a pad name is that pad's centre, name@x,y a point inside that pad or via, vN(x,y) a via of type N, cw(c..) or ccw(c..) an arc to the next point about the centre after c; other vN are vias at no path point)
3V3: C3.1 C13.1 C14.1 C15.1 C16.1 C17.1 C18.1 C19.1 C22.2 CN3.2 FB1.1 JP3.1 R8.1 R14.1 R21.1 R22.1 R28.1 U1.5 U4.19 U4.32 U4.48 U4.64 U5.2
5V: C1.1 C2.1 C4_Gin1.2 C4_Gin2.2 C4_Gin3.2 C20.2 C21.2 CN6.4 D5.K F1.2 R16.2 R27.1 U1.3 U2_Gin1.5 U2_Gin2.5 U2_Gin3.5 U5.3 | length 5.7
  Top Layer w0.203: C4_Gin1.2 44.8,16.3 45.35,15.75 U2_Gin1.5 ; C4_Gin2.2 44.8,30.4 45.4,29.8 U2_Gin2.5@45.4,28.9
5V_ADC: R16.1 R19.2 U4.17
5V_DEBUG: CN3.1 D5.A
blue: R9.1 U4.59
BOOT0: JP3.2 R17.1 U4.60
CAN_N: CN1.2 JP2.2 R2.2 TVS2.2 U1.6
CAN_P: CN1.1 JP2.1 R2.1 TVS1.1 U1.7
"Current Shunt In_Gin1": D1_Gin1.2 Q1_Gin1.1 Q1_Gin1.2 Q1_Gin1.3 R6_Gin1.2 U2_Gin1.3 U3_Gin1.3 | length 17.9
  Top Layer w0.203: U3_Gin1.3 32.9,13.79 32.9,12.2 37.3,7.8 40.9,7.8 41.214,8.114 41.214,9.964 R6_Gin1.2 ; R6_Gin1.2@41.3,10.1 42.2,10.1 42.8,10.7 42.8,12.8 U2_Gin1.3
"Current Shunt In_Gin2": D1_Gin2.2 Q1_Gin2.1 Q1_Gin2.2 Q1_Gin2.3 R6_Gin2.2 U2_Gin2.3 U3_Gin2.3 | length 4.5
  Top Layer w0.203: R6_Gin2.2 42.6,24.1 42.9,24.4 42.9,26.852 42.702,27.05 U2_Gin2.3
"Current Shunt In_Gin3": D1_Gin3.2 Q1_Gin3.1 Q1_Gin3.2 Q1_Gin3.3 R6_Gin3.2 U2_Gin3.3 U3_Gin3.3
"Current Shunt Out_Gin1": CN2_Gin1.3 CN2_Gin1.4 R6_Gin1.1 U2_Gin1.4 | length 4.4
  Top Layer w0.203: U2_Gin1.4 45.35,10.45 45.8,10 R6_Gin1.1@47.1,10
"Current Shunt Out_Gin2": CN2_Gin2.3 CN2_Gin2.4 R6_Gin2.1 U2_Gin2.4 | length 4.6
  Top Layer w0.203: U2_Gin2.4 45.35,24.65 45.9,24.1 R6_Gin2.1 R6_Gin2.1@47.3,24.1
"Current Shunt Out_Gin3": CN2_Gin3.3 CN2_Gin3.4 R6_Gin3.1 U2_Gin3.4
GND: C1.2 C2.2 C3.2 C4_Gin1.1 C4_Gin2.1 C4_Gin3.1 C5_Gin1.2 C5_Gin2.2 C5_Gin3.2 C6_Gin1.2 C6_Gin2.2 C6_Gin3.2 C7.2 C8.1 C9.1 C10.2 C11.2 C12.2 C13.2 C14.2 C15.2 C16.2 C17.2 C18.2 C19.2 C20.1 C21.1 C22.1 CN3.5 CN3.10 CN4.1 D2.1 D3.1 D4.1 D6.1 D7.1 D8.1 NT1.2 R4_Gin1.1 R4_Gin2.1 R4_Gin3.1 R5_Gin1.2 R5_Gin2.2 R5_Gin3.2 R10.2 R11.2 R13.2 R17.2 R18.2 R19.1 R20.1 SW1.3 SW1.4 TVS1.2 TVS2.1 U1.2 U2_Gin1.2 U2_Gin2.2 U2_Gin3.2 U3_Gin1.4 U3_Gin2.4 U3_Gin3.4 U4.12 U4.18 U4.31 U4.47 U4.63 U5.1 X1.2 X1.4 | length 15
  Top Layer w0.203: v1(40.7,12.9) R4_Gin1.1@40.7,14.4 ; R4_Gin1.1 40.936,14.264 41.436,14.264 41.8,13.9 U2_Gin1.2 42.83,14.08 43.48,14.08 43.7,14.3 43.7,15.4 43.2,15.9 43.2,17.2 C4_Gin1.1@43.3,17.3 ; R4_Gin2.1 40.8,28.5 41.4,28.5 41.9,28 U2_Gin2.2@42.6,28 ; U2_Gin2.2 43.494,28 43.613,28.119 43.613,29.787 43.2,30.2 C4_Gin2.1
green: R12.1 U4.26
NetCN4_3: CN4.3 F1.1
NetCN5_1: CN5.1 R8.2
NetD2_2: D2.2 R7.2
NetD3_2: D3.2 R9.2
NetD4_2: D4.2 R12.2
NetD6_2: D6.2 R26.2
NetD7_2: D7.2 R27.2
NetD8_2: D8.2 R28.2
NetJP1_1: JP1.1 R1.1 U4.34
NetJP1_2: JP1.2 R3.1 U4.33
NetQ1_Gin1_4: Q1_Gin1.4 U3_Gin1.5 | length 18
  Top Layer w0.203: U3_Gin1.5 31.58,8.42 31.58,9.88 v2(31.6,9.9) ; Q1_Gin1.4 v1(37.6,20.3)
  Bottom Layer w0.203: v2(31.6,9.9) 34.9,9.9 35.5,9.9 37.8,12.2 37.6,12.4 v1(37.6,20.3)
NetQ1_Gin2_4: Q1_Gin2.4 U3_Gin2.5
NetQ1_Gin3_4: Q1_Gin3.4 U3_Gin3.5
NetR1_2: R1.2 U1.1
NetR3_2: R3.2 U1.4
NetR23_1: R23.1 U4.51
NetR25_1: R25.1 U4.53
NetU1_8: U1.8 U4.29
NRST: C7.1 CN3.8 R14.2 SW1.1 SW1.2 U4.7
OSC_IN: C9.2 U4.5 X1.3
OSC_OUT: C8.2 U4.6 X1.1
PGND: CN2_Gin1.1 CN2_Gin1.2 CN2_Gin2.1 CN2_Gin2.2 CN2_Gin3.1 CN2_Gin3.2 CN6.1 CN6.2 CN6.3 D1_Gin1.1 D1_Gin2.1 D1_Gin3.1 NT1.1
Phase_Current1: R4_Gin1.2 U2_Gin1.1 U4.8 | length 3
  Top Layer w0.203: R4_Gin1.2 41.8,16.3 42.7,15.4 U2_Gin1.1@42.7,14.8
Phase_Current2: R4_Gin2.2 U2_Gin2.1 U4.9 | length 3
  Top Layer w0.203: R4_Gin2.2 41.9,30.4 42.7,29.6 U2_Gin2.1@42.7,28.9
Phase_Current3: R4_Gin3.2 U2_Gin3.1 U4.10
Phase_Input1: R5_Gin1.1 U3_Gin1.2 U4.37 | length 2.6
  Top Layer w0.203: v1(34.1,12.5) U3_Gin1.2@34.1,13.8
  Bottom Layer w0.203: v1(34.1,12.5) 34.1,11.25 R5_Gin1.1
Phase_Input2: R5_Gin2.1 U3_Gin2.2 U4.38
Phase_Input3: R5_Gin3.1 U3_Gin3.2 U4.39
red: R7.1 U4.35
"Sensor Input 1": CN5.2 R10.1 R23.2
"Sensor Input 2": CN5.3 R11.1 R24.2
"Sensor Input 3": CN5.4 R13.1 R25.2
"Stepper Motor": CN4.2 U4.21
SWCLK: CN3.6 R20.2 U4.49
SWDIO: CN3.7 R21.2 U4.46
SWO: CN3.9 R22.2 U4.55
UART_RX: CN3.4 U4.15
UART_TX: CN3.3 U4.14
VBATT: C5_Gin1.1 C5_Gin2.1 C5_Gin3.1 C6_Gin1.1 C6_Gin2.1 C6_Gin3.1 CN6.5 CN6.6 Q1_Gin1.5 Q1_Gin2.5 Q1_Gin3.5 R15.1 R26.1 U3_Gin1.1 U3_Gin2.1 U3_Gin3.1
VBATT_ADC: R15.2 R18.1 U4.16
VCAP1: C12.1 U4.30
VREF+: C10.1 C11.1 FB1.2 U4.13
pads on no net: CN2_Gin1.None CN2_Gin2.None CN2_Gin3.None CN6.None1 CN6.None2 MH1.1 MH2.1 MH3.1 MH4.1 R24.1 TVS1.3 TVS2.3 U3_Gin1.6 U3_Gin1.7 U3_Gin1.8 U3_Gin2.6 U3_Gin2.7 U3_Gin2.8 U3_Gin3.6 U3_Gin3.7 U3_Gin3.8 U4.1 U4.2 U4.3 U4.4 U4.11 U4.20 U4.22 U4.23 U4.24 U4.25 U4.27 U4.28 U4.36 U4.40 U4.41 U4.42 U4.43 U4.44 U4.45 U4.50 U4.52 U4.54 U4.56 U4.57 U4.58 U4.61 U4.62

## Polygon pours and split planes (outlines as drawn)
"Current Shunt In_Gin2" on Top Layer "CURRENT_SHUNT_IN_GIN2_L01_P013" (solid, remove dead copper, pour order 13): 44,22 44,27.9 46.5,27.9 49.8,31.2 51.6,31.2 51.6,35.7 47.2,35.7 43.9,32.4 36.3,32.4 36.3,22
"Current Shunt Out_Gin2" on Top Layer "CURRENT_SHUNT_OUT_GIN2_L01_P012" (solid, remove dead copper, pour order 12): 44,22 51.5,22 51.6,22.1 51.6,31.2 49.8,31.2 46.5,27.9 44,27.9